# Altium PCB PCB1.PcbDoc (part 2 of 3)
Units mm, origin at the board's own origin, x right, y up, seen from the top; angles counter-clockwise.
Board outline 200 x 55 mm, 4 copper layers (Top Layer, Power Layer, GND Layer, Bottom Layer), stack 1.714 mm thick; 398 components, 267 nets, 1326 pads, 588 vias.
Unrouted connection lines stored in the file: 81.
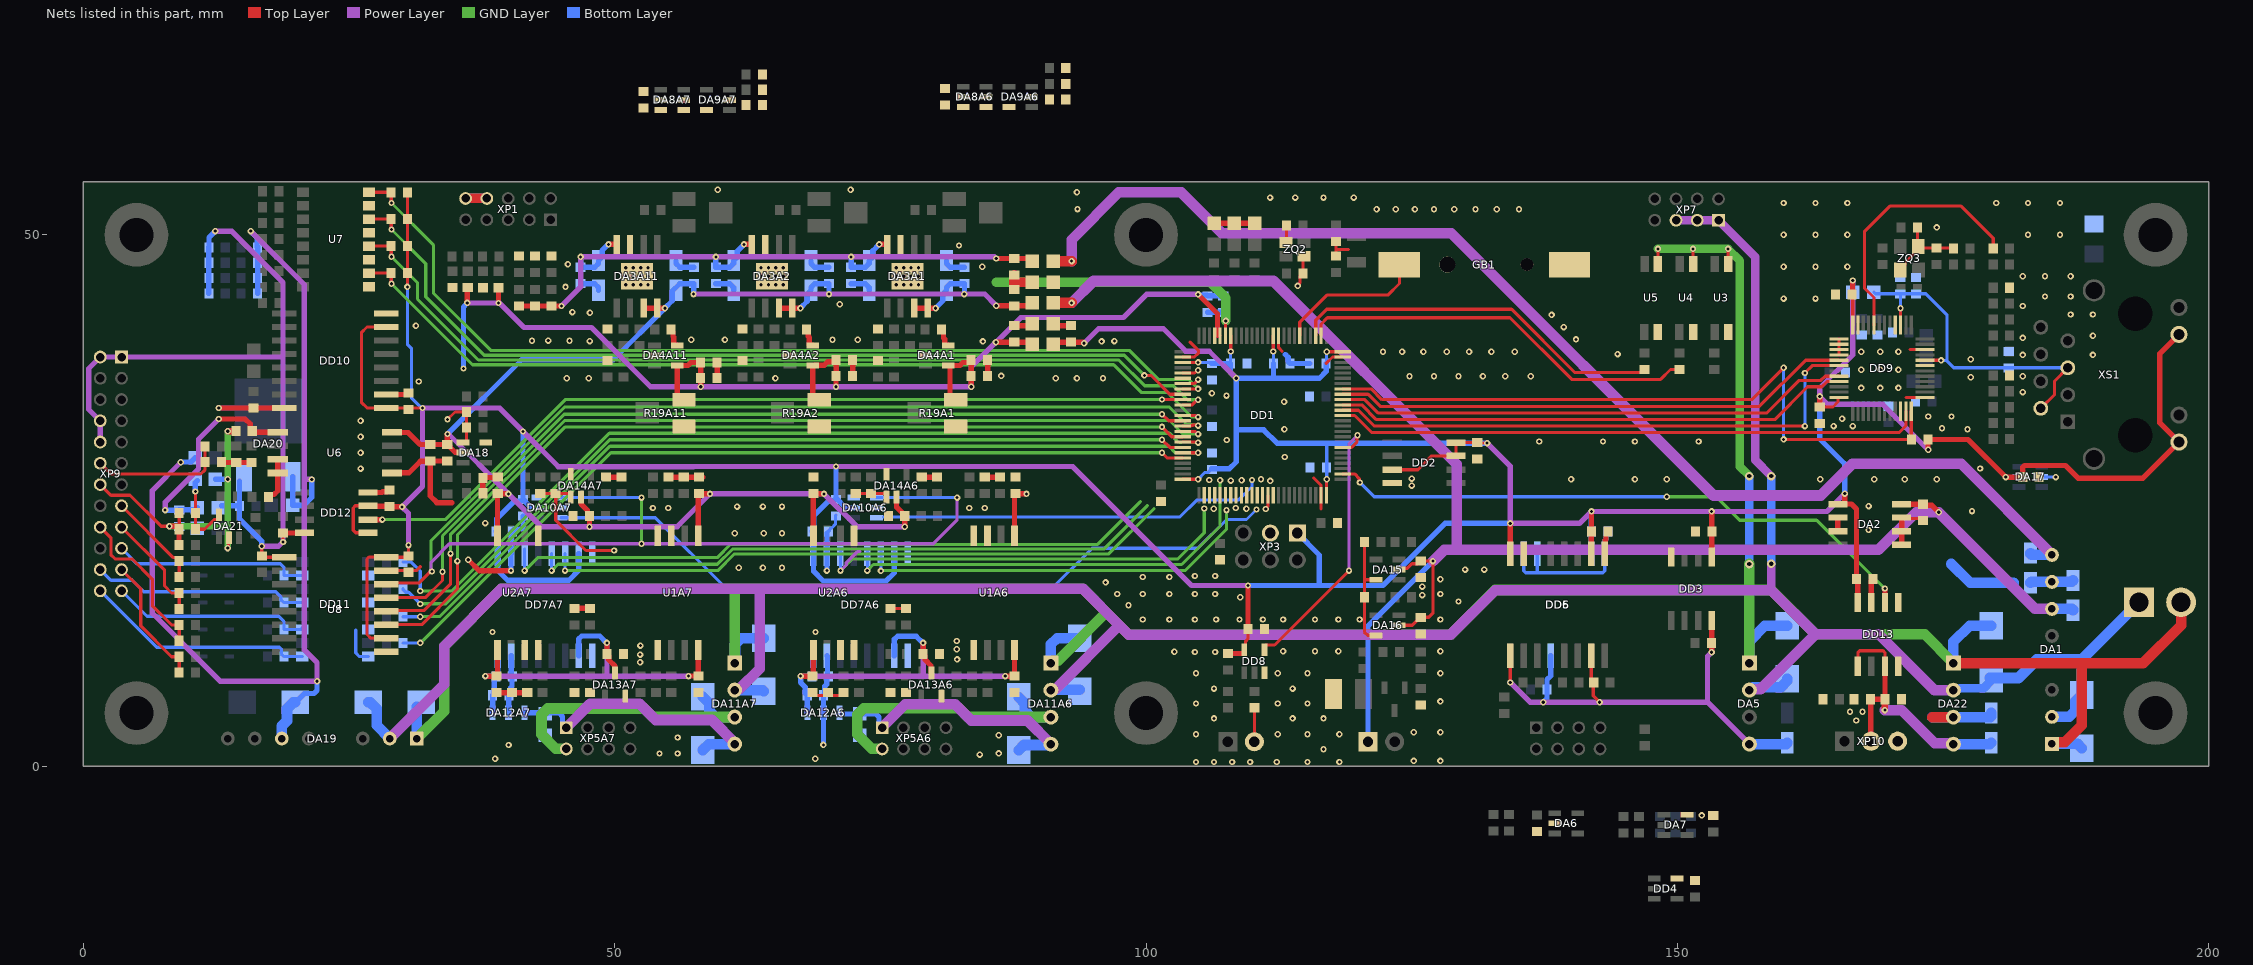
[diagram p4: the nets of this part, all layers, seen from the top]

## Via types
v1: diameter 0.6, hole 0.3, Top Layer to Bottom Layer, tented both sides, 547 vias
v2: diameter 0.6, hole 0.3, Top Layer to Bottom Layer, 36 vias
v3: diameter 0.8, hole 0.4, Top Layer to Bottom Layer, tented both sides, 4 vias
v4: diameter 0.5, hole 0.2, Top Layer to Bottom Layer, tented both sides, 1 vias

## Nets (pads, with @x,y where several pads share a name; then routed paths per layer and width w, separated by ;. In a path a pad name is that pad's centre, name@x,y a point inside that pad or via, vN(x,y) a via of type N, cw(c..) or ccw(c..) an arc to the next point about the centre after c; other vN are vias at no path point) (continued)
+3.3V: C7.1 C8.1 C11.2 C12.2 C13.2 C17.1 C18.1 C24.1 C35.1 C38.1 C39.1 C49A6.1 C49A7.1 C52A6.1 C52A7.1 C58A6.1 C58A7.1 C75.1 C78.1 C83.1 C88.1 C98.1 C101.1 C103.1 C117.1 DA2.1 DA9A6.2 DA9A7.2 DA10A6.5 DA10A7.5 DA17.5 DD1.11 DD1.19 DD1.28 DD1.50 DD1.75 DD1.100 DD2.3 DD2.7 DD2.8 DD3.1 DD5.10 DD5.16 DD6.7 DD7A6.1 DD7A6.7 DD7A7.1 DD7A7.7 DD8.5 DD9.24 DD9.36 DD10.1 DD10.7 DD11.10 DD11.16 DD12.1 DD12.3 DD13.8 L3.1 L6.1 R57.2 R72.2 R93.1 R94.1 R96.1 R97.1 XP3.1 XS1.9 XS1.11 | length 498.7
  Top Layer w0.3: DD12.1@26.8,21.95 26.776,21.974 25.626,21.974 25.4,22.2 25.4,24.3 25.6,24.5 DD12.3@26.8,24.5 DD12.3@26.825,24.475 ; DD11.16@28.485,19.685 26.876,19.685 26.7,19.509 26.7,12.39 27.04,12.05 DD11.10@28.5,12.05 ; DD11.16@28.5,19.67 30.47,19.67 C101.1@30.6,19.8 v1(30.6,20.8) ; DD10.7@28.5,41.325 26.7,41.325 26.175,40.8 26.175,34.241 26.711,33.705 DD10.1@28.5,33.705 28.502,33.703 30.598,33.703 C98.1@30.613,33.687 ; v1(30.5,45.1) R97.1@30.5,46.4 R94.1@30.5,51.5 R93.1@30.5,54 ; C98.1@30.613,33.713 31.913,33.713 v1(31.925,33.7) ; DD1.50@103.45,27 v1(104.9,27) ; DD1.28@103.45,38 v1(104.9,38) ; v1(107.975,39.025) DD1.19@107.975,40.525 ; DD8.5@109.125,10.6 109.25,10.725 DD8.5@109.25,10.95 109.375,11.075 109.375,11.75 109.6,11.975 C75.1@109.6,12.9 ; v1(111.975,39.025) DD1.11@111.975,40.525 ; DD1.75@116.975,25.475 116.975,26.975 v1(117,27) ; v1(117,39) DD1.100@118.5,39 ; DD2.3@123.171,27.896 125.596,27.896 126.896,29.196 DD2.7@129.171,29.196 DD2.8@129.171,30.446 C24.1@131.171,30.446 131.193,30.423 132.077,30.423 v1(132.1,30.4) ; C88.1@163.4,33.8 164.644,33.8 165.12,34.276 165.12,34.7 DD9.36@165.2,34.7 ; C83.1@166.475,44.425 C83.1@166.45,44.4 166.5,44.35 DD9.24@166.5,41.5 ; v1@166.475,45.675 v1(166.5,45.7)
  Top Layer w0.5: DD12.3@26.825,24.475 C103.1@28.775,24.475 ; C103.1@28.825,24.425 28.831,24.419 29.981,24.419 v1(30,24.4) ; L3.1@91.275,39.7 91.475,39.9 C7.1@92.95,39.9 94.048,39.9 94.147,39.801 v1(94.174,39.801) ; R57.2@107.7,10.6 DD8.5@109.125,10.6 ; C75.1@109.6,12.9 v1(109.6,17) ; DD5.16@134.281,20.01 v1(134.281,22.85) ; C39.1@141.9,21.85 141.916,21.866 141.916,23.966 v1(141.925,23.975) ; DD5.10@141.901,20.01 C39.1@141.901,21.838 ; C35.1@153.225,22.1 v1(153.225,23.975) ; DD3.1@153.231,19.7 C35.1@153.231,22.056 ; C88.1@163.4,33.8 v1(163.4,34.8) ; DA2.1@165.1,24.65 165.7,24.65 165.749,24.7 DA2.1@165.749,24.67 ; DA2.1@165.75,24.67 166.38,24.67 166.85,24.2 C117.1@166.85,17.625 166.989,17.486 DD13.8@166.989,15.4 ; DA2.1@165.75,24.7 v1(165.75,25.654) ; C83.1@166.475,44.425 v1@166.475,45.675 ; v1(173.6,29.775) 173.587,29.788 173.587,30.738 R72.2@173.575,30.75 177.35,30.75 v1(180.9,27.2) 182.475,27.2 C78.1@182.5,27.225 182.5,28.124 182.676,28.3 186.512,28.3 187.712,27.1 193.8,27.1 XS1.9@197.2,30.5 195.4,32.3 195.4,38.83 XS1.11@197.2,40.63
  Power Layer w0.5: v1(30.6,20.8) 30.6,23.8 v1(30,24.4) 31.925,26.325 v1@31.925,33.675 ; v1(31.925,33.7) 39.175,33.7 v1(41.375,31.5) 44.7,28.175 57.386,28.175 57.411,28.2 93.1,28.2 104.3,17 v1(109.6,17) ; v1(94.174,39.801) 95.55,41.176 101.624,41.176 103.75,39.05 105.95,39.05 v1(108.5,36.5) ; v1(132.1,30.4) 134.281,28.219 v1(134.281,22.85) 140.8,22.85 v1(141.925,23.975) v1(153.225,23.975) 164.071,23.975 v1(165.75,25.654) ; v1(166.5,45.7) 166.5,38.711 163.4,35.611 v1(163.4,34.8) 164.145,34.055 169.32,34.055 v1(173.6,29.775)
  Bottom Layer w0.3: v1(30.5,45.1) 30.5,39.703 30.875,39.328 30.875,34.674 31.849,33.7 v1(31.925,33.7) ; v1(104.9,27) 105.55,27.65 105.875,27.65 106.2,27.975 106.224,27.999 C13.2@106.224,28.024 ; v1(104.9,38) 106.1,38 C12.2@106.2,37.9 ; C8.1@107.95,37.9 107.962,37.912 107.962,39.013 v1(107.975,39.025) ; v1(111.975,39.025) 111.987,39.013 C11.2@111.987,37.9 ; C17.1@116.95,37.9 116.975,37.925 116.975,38.975 v1(117,39) ; v1(117,27) C18.1@117,28.1 117,30.4 ; L6.1@166.5,44.6 v1(166.5,45.7) ; v1(180.9,27.2) 180.912,27.212 182.137,27.212 DA17.5@182.15,27.225
  Bottom Layer w0.5: C52A7.1@41.375,25.1 41.221,24.946 40.569,24.946 38.92,23.297 38.92,22.163 C58A7.1@38.857,22.1 38.99,21.967 DD7A7.1@38.99,20 38.99,18.435 39.94,17.485 45.681,17.485 46.61,18.414 DD7A7.7@46.61,20 ; C52A7.1@41.375,25.125 v1(41.375,31.5) ; C52A7.1@41.425,25.1 41.6,24.925 41.6,24.875 42.125,24.35 42.775,24.35 DA10A7.5@42.8,24.325 ; C58A6.1@68.575,22.1 68.75,22.275 68.75,23.575 70.175,25 70.65,25 C52A6.1@70.825,25.175 ; C58A6.1@68.622,22.183 68.705,22.1 DD7A6.1@68.705,20 68.705,18.351 69.631,17.425 75.55,17.425 76.325,18.2 DD7A6.7@76.325,20 ; C52A6.1@70.825,25.1 v1(70.825,28.2) ; C52A6.1@70.875,25.175 71.7,24.35 72.475,24.35 DA10A6.5@72.5,24.325 ; C13.2@106.2,27.975 107.826,27.975 108.5,28.649 108.5,31.654 ; C12.2@106.2,37.9 C8.1@107.95,37.9 107.95,37.05 v1(108.5,36.5) ; v1(109.6,17) 116.307,17 ; C11.2@112,37.9 112,36.5 ; XP3.1@114.24,21.94 116.307,19.873 116.307,17 ; C17.1@116.95,37.9 116.95,37.15 116.3,36.5 112,36.5 ; v1(132.1,30.4) 117,30.4 112.325,30.4 111.071,31.654 108.5,31.654 ; v1(134.281,22.85) 128.15,22.85 122.3,17 116.307,17 ; DD6.7@141.883,20.01 C38.1@141.883,22.052 ; C38.1@141.901,22.019 C38.1@141.916,22.033 ; C38.1@141.906,22.075 v1@141.906,23.956 ; v1(163.4,34.8) 163.4,30.804 165.75,28.454 v1(165.75,25.654) ; 108.5,31.654 v1(108.5,36.5) ; v1(108.5,36.5) 112,36.5
+3.3VA: C9.2 C10.1 C15.2 C32A1.1 C32A2.1 C32A11.1 C33A1.1 C33A2.1 C33A11.1 C51A6.1 C51A7.1 DA4A1.4 DA4A2.4 DA4A11.4 DA8A6.5 DA8A7.5 DD1.21 DD1.22 L3.2 R19A1.3 R19A2.3 R19A11.3 R20A3.1 R20A4.1 | length 121
  Top Layer w0.3: DD1.22@106.475,40.525 106.725,40.525 DD1.21@106.975,40.525
  Top Layer w0.5: v1(36.125,43.593) 36.144,43.612 36.144,44.994 R20A4.1@36.175,45.025 ; v1(39.073,43.59) R20A3.1@39.073,45.018 ; R19A11.3@56.525,34.475 56.3,34.475 55.9,34.875 DA4A11.4@55.9,37.7 56.892,37.7 57.172,37.98 C32A11.1@58.1,37.98 ; v1@58.1,35.895 C33A11.1@58.1,36.525 ; C33A11.1@58.1,36.33 C32A11.1@58.1,37.7 ; DA4A2.4@68.65,37.7 68.65,34.775 R19A2.3@68.95,34.475 ; DA4A2.4@68.8,37.7 68.825,37.725 69.717,37.725 70.043,38.051 70.696,38.051 C32A2.1@70.85,38.205 C33A2.1@70.85,36.705 70.838,36.692 70.838,35.713 v1(70.825,35.7) ; R19A1.3@82.1,34.475 81.95,34.475 81.55,34.875 81.55,37.7 81.554,37.704 82.482,37.704 82.757,37.98 83.375,37.98 83.55,38.155 C32A1.1@83.55,38.205 ; v1(83.55,35.7) C33A1.1@83.55,36.705 C32A1.1@83.55,37.98 ; v1(85.875,39.9) C10.1@87.6,39.9 ; C10.1@87.625,39.9 89.075,39.9 L3.2@89.275,39.7 ; v1@104.919,44.381 106.725,42.575 106.725,40.525
  Power Layer w0.5: v1(36.125,43.593) v1@39.146,43.593 ; v1@39.119,43.593 39.119,43.571 39.167,43.571 41.463,41.275 47.824,41.275 53.399,35.7 v1(58.1,35.7) v1(70.825,35.7) v1(83.55,35.7) 83.55,37.55 88.225,42.225 97.875,42.225 100.05,44.4 v1(104.9,44.4)
  Bottom Layer w0.5: v1(35.775,37.425) 35.775,43.216 36.125,43.566 v1(36.125,43.593) ; v1(104.9,44.4) 104.957,44.343 105.707,44.343 C15.2@105.8,44.25 ; C15.2@105.808,44.258 C9.2@107.216,44.258
+3.3VA_ETH: C76.1 C87.1 C90.1 DD9.8 DD9.15 L6.2 XS1.2 XS1.5 | length 33.6
  Top Layer w0.3: DD9.15@171,41.5 v1(171,43.1) ; DD9.8@173.3,38.2 174.797,38.2 v1(174.816,38.182) ; XS1.2@184.2,33.677 185.5,34.977 185.5,36.247 XS1.5@186.74,37.487
  Bottom Layer w0.3: L6.2@168.5,44.6 168.65,44.45 C87.1@170.975,44.45 ; v1(171,43.1) 171,44.425 C87.1@170.975,44.45 ; v1(174.816,38.182) 175.382,38.182 ; XS1.5@186.74,37.487 C76.1@181.179,37.487 176.013,37.487 175.382,38.118 175.382,42.433 173.365,44.45 C90.1@172.442,44.45 C87.1@170.975,44.45
+5V: C2.1 C6.1 C71.1 C72.1 DA1.6 DA2.8 DA15.2 DA16.2 L1.1 XP6.1 | length 155.8
  Top Layer w0.3: DA15.2@123.8,18.5 123.921,18.621 124.59,18.621 125.019,19.05 125.575,19.05 C71.1@125.85,19.325 125.863,19.312 126.988,19.312 v1(127,19.3) 127,14.4 126.607,14.007 C72.1@125.85,14.007 125.8,14.007 125.05,13.257 124.121,13.257 123.996,13.382 DA16.2@123.871,13.257
  Top Layer w0.5: DA2.8@170.735,24.65 DA2.8@171.1,24.65 C6.1@173.1,24.65 173.209,24.541 173.952,24.541 v1@174.574,23.919
  Top Layer w1: L1.1@91.275,43.6 v1(93,43.6)
  Power Layer w1: v1(93,43.6) 95.058,45.658 111.992,45.658 129.225,28.424 129.225,20.35 ; v1(127,19.3) 128.05,20.35 129.225,20.35 ; v1@174.593,23.877 183.65,14.82 DA1.6@185.25,14.82 ; v1(174.593,23.9) 172.465,23.9 168.915,20.35 129.225,20.35
  Bottom Layer w0.5: XP6.1@120.896,2.3 120.896,13.196 v1(127,19.3)
  Bottom Layer w1: DA1.6@185.25,14.82 187.125,14.82 187.225,14.72 C2.1@187.225,14.675
+5V_DRVA6: C55A6.1 C60A6.1 C62A6.1 C65A6.1 C66A6.1 DA12A6.1 DA13A6.2 DD7A6.10 DD7A6.16 U1A6.8 U2A6.1 | length 44.2
  Top Layer w0.5: v1(67.5,8.475) C55A6.1@68.6,8.475 ; C55A6.1@68.625,8.475 68.7,8.55 U2A6.1@68.7,10.925 ; v1(79.025,11.6) C66A6.1@79.025,10.575 79.2,10.4 79.2,10.025 79.775,9.45 79.775,8.785 DA13A6.2@79.8,8.76 ; v1(86.75,8.475) C60A6.1@87.625,8.475 U1A6.8@87.625,11.1
  Power Layer w0.5: v1(67.5,8.475) 79.025,8.475 ; v1(79.025,11.6) 79.025,8.475 ; v1(86.75,8.475) 79.025,8.475
  Bottom Layer w0.5: C65A6.1@68.12,6.62 68.12,5.028 DA12A6.1@68.145,5.003 ; C65A6.1@68.125,6.675 67.95,6.85 67.95,7.421 67.5,7.871 v1(67.5,8.475) 67.519,8.456 68.544,8.456 C62A6.1@68.575,8.425 68.705,8.555 DD7A6.16@68.705,10.6 ; DD7A6.10@76.325,10.4 76.325,11.932 76.618,12.225 78.373,12.225 78.998,11.6 v1(79.025,11.6)
+5V_DRVA7: C55A7.1 C60A7.1 C62A7.1 C65A7.1 C66A7.1 DA12A7.1 DA13A7.2 DD7A7.10 DD7A7.16 U1A7.8 U2A7.1 | length 42.5
  Top Layer w0.5: v1(37.835,8.475) C55A7.1@38.875,8.475 38.985,8.585 U2A7.1@38.985,10.925 ; v1(49.275,11.6) 49.275,10.525 49.45,10.35 49.45,10.008 50.025,9.433 50.025,8.785 DA13A7.2@50.05,8.76 ; v1(56.95,8.475) 56.963,8.488 57.863,8.488 C60A7.1@57.875,8.5 U1A7.8@57.875,10.925
  Power Layer w0.5: 38.825,8.475 49.275,8.475 ; v1(49.275,11.6) 49.275,8.475 ; v1(56.95,8.475) 49.275,8.475
  Bottom Layer w0.5: v1(37.835,8.475) 38.915,8.475 38.99,8.55 DD7A7.16@38.99,10.4 ; C65A7.1@38.5,6.675 38.675,6.85 38.675,7.193 C62A7.1@38.675,8.475 ; DA12A7.1@38.525,5.025 C65A7.1@38.525,6.65 ; DD7A7.10@46.61,10.4 46.61,11.957 46.903,12.25 48.598,12.25 49.248,11.6 v1(49.275,11.6)
+5V_FS: C114.1 C115.1 C116.1 DA22.4 DD13.1 DD13.3 XP10.2 | length 26.2
  Top Layer w0.3: DD13.1@166.989,9.4 166.99,10.685 167.166,10.861 169.363,10.861 169.539,10.685 DD13.3@169.539,9.4
  Top Layer w0.5: XP10.2@168.225,2.35 168.2,2.375 168.2,6.275 C114.1@168.175,6.3 C115.1@169.525,6.3 ; C115.1@169.539,6.311 DD13.3@169.539,9.4
  Top Layer w0.6: v1(169.525,5.275) 169.525,6.297 C115.1@169.539,6.311
  Power Layer w1: v1(169.525,5.275) 171.1,5.275 174.223,2.152 175.898,2.152 DA22.4@175.975,2.075
  Bottom Layer w0.6: DA22.4@175.899,2.151 DA22.4@175.975,2.075
  Bottom Layer w1: DA22.4@175.975,2.075 179.4,2.075 C116.1@179.525,2.2
+5V_HW: C95.1 C96.1 C106.1 C107.1 DA20.3 DD10.16 DD11.1 DD12.8 L7.1 R110.2 R111.2 R112.2 R113.2 XP9.1 XP9.2 XP9.8 XP9.10 | length 93.6
  Top Layer w0.3: C96.1@16.8,19.8 v1(16.8,20.7) ; C96.1@17.1,19.695 17.125,19.67 DD11.1@18.8,19.67 ; v1(18.8,21.1) C106.1@18.8,21.95
  Top Layer w0.5: v1(12.75,33.7) C95.1@16,33.7 16.005,33.705 18.995,33.705 DD10.16@19,33.71 ; C106.1@18.8,21.95 DD12.8@20.8,21.95
  Power Layer w0.5: XP9.10@1.6,30.5 XP9.8@1.6,32.5 0.518,33.582 0.518,37.418 XP9.2@1.6,38.5 18.8,38.5 ; v1(12.425,50.35) 13.956,50.35 18.8,45.506 18.8,38.5 ; v1(12.75,33.7) 12.755,33.705 18.8,33.705 ; v1(16.8,20.7) 18.373,20.7 18.773,21.1 v1(18.8,21.1) 18.8,33.705 ; 18.8,33.705 18.8,38.5
  Bottom Layer w0.5: R110.2@11.809,44.475 R111.2@11.809,45.925 R113.2@11.809,48.825 ; R113.2@11.825,48.8 11.825,49.75 v1(12.425,50.35) ; L7.1@13,24.5 C107.1@14.7,24.5 ; DA20.3@14.7,26.804 C107.1@14.7,24.5 ; v1@16.767,20.733 16.781,20.746 16.781,21.194 14.7,23.275 C107.1@14.7,24.5
+5V_PS: C37.1 C41.1 C42.1 C43.1 C44.1 C45.1 C46.1 DA5.4 DA6.2 DA7.5 DD3.8 DD4.5 DD5.1 DD5.7 DD6.13 | length 48.4
  Top Layer w0.3: v1@134.231,7.875 v1(134.281,7.875) ; v1(134.281,7.875) DD5.1@134.281,10.41 ; DD5.7@141.901,10.41 141.901,8.13 C44.1@142.131,7.9 ; C44.1@142.131,7.875 142.088,7.875 142.088,6.619 v1(142.681,6.025)
  Top Layer w0.5: v1(153.225,10.725) DD3.8@153.225,13.7
  Power Layer w0.5: v1(134.281,7.875) 136.131,6.025 v1(137.381,6.025) v1(142.681,6.025) 152.836,6.025 ; v1(153.225,10.725) 152.836,10.336 152.836,6.025 ; DA5.4@156.781,2.08 152.836,6.025
  Bottom Layer w0.5: v1(137.381,6.025) 137.731,6.375 C45.1@137.731,7.2 137.731,8.15 138.091,8.51 DD6.13@138.091,10.41
  Bottom Layer w1: DA5.4@156.781,2.08 160.25,2.08 160.35,2.18 C43.1@160.35,2.2
  other v1: 152.3,-4.629
+5VA: C4.1 C28A1.1 C28A2.1 C28A11.1 C29A1.1 C29A2.1 C29A11.1 C54A6.1 C54A7.1 C61A6.1 C61A7.1 C67A6.1 C67A7.1 C97.1 C100.1 DA3A1.7 DA3A1.8 DA3A2.7 DA3A2.8 DA3A11.7 DA3A11.8 DA14A6.2 DA14A7.2 DA18.2 L1.2 U1A6.1 U1A7.1 U2A6.8 U2A7.8 U6.8 | length 162.8
  Top Layer w0.5: U6.8@29.05,31.425 29.067,31.408 30.567,31.408 31.7,30.275 C97.1@32.65,30.275 32.654,30.279 34.246,30.279 C100.1@34.25,30.282 ; C100.1@34.263,30.295 34.263,31.245 v1(34.275,31.257) ; C100.1@34.3,30.282 34.475,30.107 34.475,30.057 35,29.532 35.7,29.532 DA18.2@35.725,29.507 ; U2A7.8@38.985,21.675 C61A7.1@38.985,25.625 ; C61A7.1@38.998,25.638 39.004,25.631 39.994,25.631 v1(40,25.625) ; DA14A7.2@46.825,25.325 46.85,25.3 46.85,24.675 47.45,24.075 47.45,23.725 C67A7.1@47.625,23.55 47.631,23.544 47.631,22.544 v1(47.638,22.538) ; DA3A11.7@52.75,43.105 DA3A11.8@54,43.105 54.005,43.1 v1(54.725,43.1) ; U1A7.1@57.875,21.675 57.875,25.552 C54A7.1@57.96,25.638 ; C54A7.1@57.95,25.65 57.963,25.638 58.963,25.638 v1(58.975,25.625) ; DA3A2.7@65.466,43.105 65.471,43.1 v1(67.475,43.1) ; U2A6.8@68.7,21.675 68.7,25.6 68.75,25.65 68.762,25.638 69.688,25.638 v1(69.7,25.625) ; DA14A6.2@76.525,25.325 76.525,24.375 C67A6.1@77.262,23.638 ; v1(77.3,22.538) C67A6.1@77.3,23.55 ; DA3A1.7@78.2,43.105 78.205,43.1 v1(80.2,43.1) ; v1(85.9,43.325) C4.1@87.6,43.325 ; U1A6.1@87.619,21.681 87.619,25.606 87.663,25.65 C54A6.1@87.725,25.65 87.738,25.638 88.738,25.638 v1(88.75,25.625) ; C4.1@87.65,43.325 89,43.325 L1.2@89.275,43.6
  Power Layer w0.5: v1(34.275,31.257) 34.294,31.238 34.387,31.238 v1@39.981,25.644 ; v1(40,25.625) 43.1,22.525 v1@47.631,22.525 ; v1(47.638,22.538) 55.888,22.538 58.987,25.638 59,25.625 v1(69.7,25.625) 72.787,22.538 v1(77.3,22.538) ; v1@57.675,44.425 v1(70.175,44.425) v1(82.9,44.425) 84.825,44.425 85.9,43.35 v1(85.9,43.325)
  Bottom Layer w0.5: v1(34.275,31.257) 41.262,38.244 49.869,38.244 v1(54.725,43.1) 55.425,43.8 55.425,44.7 56.125,45.4 C28A11.1@57.45,45.4 57.437,45.387 57.437,44.438 v1(57.425,44.425) ; v1@67.494,43.119 68.125,43.75 68.125,44.425 C29A2.1@68.475,44.775 68.475,45.05 68.825,45.4 C28A2.1@70.175,45.4 v1(70.175,44.425) ; v1@80.219,43.119 80.875,43.775 80.875,44.425 C29A1.1@81.225,44.775 81.225,45.05 81.575,45.4 C28A1.1@82.925,45.4 82.912,45.387 82.912,44.438 v1(82.9,44.425)
+5VA_HW: C93.1 C111.1 L7.2 U6.1 | length 20.1
  Top Layer w0.5: v1(12.75,32.675) 15.233,32.675 15.725,32.183 15.725,31.7 16,31.425 U6.1@18.3,31.425
  Power Layer w0.5: v1(7.7,24.1) 7.7,24.832 10.841,27.973 10.841,30.766 v1(12.75,32.675)
  Bottom Layer w0.5: v1(7.7,24.1) 7.703,24.097 C111.1@9.032,24.097 ; C111.1@9.032,24.12 10.512,24.12 L7.2@10.717,24.325
+12V_DRVA6: C53A6.1 C59A6.2 DA11A6.4 DA12A6.3 XP5A6.1 | length 26.7
  Power Layer w1: XP5A6.1@75.185,3.653 77.357,5.825 82.023,5.825 83.545,4.303 88.847,4.303 DA11A6.4@91.05,2.1
  Bottom Layer w0.5: DA12A6.3@71.145,5.003 71.145,4.947 71.18,4.912 C59A6.2@73.045,4.912 ; C59A6.2@73.053,4.903 74.589,4.903 74.882,4.611 74.882,3.956 XP5A6.1@75.185,3.653
  Bottom Layer w1: C53A6.1@88.015,1.488 88.525,1.998 90.973,1.998 DA11A6.4@91.05,2.075 ; DA11A6.4@90.984,2.144 DA11A6.4@91.045,2.083
+12V_DRVA7: C53A7.1 C59A7.2 DA11A7.4 DA12A7.3 XP5A7.1 | length 26.6
  Power Layer w1: XP5A7.1@45.45,3.625 47.688,5.863 52.336,5.863 53.858,4.342 59.16,4.342 DA11A7.4@61.363,2.138
  Bottom Layer w0.5: DA12A7.3@41.525,5.025 43.475,5.025 44.758,5.025 45.1,4.683 45.1,3.975 XP5A7.1@45.45,3.625
  Bottom Layer w1: C53A7.1@58.3,1.525 58.85,2.075 DA11A7.4@61.325,2.075
+24V: C1.1 C36.1 C50A6.1 C50A7.1 C104.1 C113.1 DA1.2 DA5.2 DA11A6.2 DA11A7.2 DA19.2 DA22.2 XP2.1 XP7.1 XP7.3 XP7.5 | length 273.8
  Power Layer w0.8: XP7.5@149.875,51.375 XP7.3@151.875,51.375 XP7.1@153.875,51.375 157.324,47.926 157.324,28.801 v3(158.825,27.3) ; 158.831,16.569 v3(158.831,19.05)
  Power Layer w1: DA19.2@28.84,2.6 33.952,7.712 33.952,11.302 39.333,16.683 63.65,16.683 ; DA11A7.2@61.325,7.18 61.402,7.257 61.732,7.257 63.65,9.175 63.65,16.683 ; DA11A6.2@91.045,7.163 91.121,7.24 91.481,7.24 97.495,13.255 ; DA5.2@156.781,7.16 156.848,7.226 157.826,7.226 163,12.4 ; DA22.2@175.975,7.155 174.195,7.155 168.95,12.4 163,12.4 ; 63.65,16.683 94.067,16.683 97.495,13.255 ; 97.495,13.255 98.376,12.374 128.657,12.374 132.852,16.569 158.831,16.569 163,12.4
  Bottom Layer w0.8: v3(158.831,19.05) v3@158.831,27.3 ; DA22.2@175.975,7.155 176.09,7.27 176.514,7.27 176.582,7.337 178.825,7.337 179.525,8.037 C113.1@179.525,8.225
  Bottom Layer w1: C104.1@26.8,6 27,6 27.6,5.4 27.6,3.84 DA19.2@28.783,2.657 ; DA11A7.2@61.325,7.155 63.92,7.155 C50A7.1@64.025,7.05 ; DA11A6.2@91.045,7.163 91.065,7.183 93.725,7.183 C50A6.1@93.745,7.203 ; DA5.2@156.781,7.16 156.89,7.16 157.15,7.42 159.164,7.42 159.169,7.425 159.75,7.425 160.35,8.025 C36.1@160.35,8.225 ; C113.1@179.395,8.295 182.095,8.295 183.835,10.035 188.05,10.035 ; DA1.2@185.25,4.64 186.864,4.64 187.45,5.226 187.45,6.1 C1.1@188.05,6.7 188.05,10.035 ; XP2.1@193.44,15.425 188.05,10.035
+24V_HW: C105.2 C108.1 DA19.6 DA20.1 L8.1 R106.2 R107.2 R108.2 R109.2 | length 100.7
  Power Layer w0.5: v1(9.175,28.6) 6.5,25.925 6.5,14.391 12.903,7.988 v1(22,7.988) 22,9.741 20.8,10.941 20.8,26.996 ; v1(15.75,50.35) 20.8,45.3 20.8,26.996 ; v1(21.5,26.975) 21.481,26.994 20.802,26.994 20.8,26.996
  Bottom Layer w0.5: v1(9.175,28.6) 9.202,28.6 9.232,28.63 10.133,28.63 L8.1@10.518,29.015 ; v1(15.75,50.35) 15.75,50.323 16.348,49.725 16.348,48.886 R109.2@16.409,48.825 ; R106.2@16.409,44.475 R107.2@16.409,45.925 R108.2@16.409,47.375 R109.2@16.409,48.875 ; DA20.1@19.7,27.229 C105.2@19.7,24.535 19.732,24.567 20.792,24.567 21.5,25.275 v1(21.5,26.975) ; C108.1@19.959,6 20.804,6.845 21.707,6.845 22,7.138 v1(22,7.988)
  Bottom Layer w1: DA19.6@18.68,2.6 18.68,3.78 19.169,4.269 19.169,5.4 19.769,6 C108.1@19.959,6
+24VA_HW: C110.1 C112.1 DA21.5 L8.2 | length 7.7
  Top Layer w0.3: v1(10.55,25.85) 10.558,25.842 C112.1@10.558,23.823 ; C112.1@10.574,23.864 C110.1@10.575,22.3 C110.1@10.575,22.3 11.408,22.3 12.308,23.2 12.633,23.2 12.758,23.325 DA21.5@12.758,23.65
  Bottom Layer w0.5: v1(10.55,25.85) 10.534,25.866 10.534,26.67 L8.2@10.753,26.888
+VBAT: DD1.6 GB1.2 | length 13.9
  Top Layer w0.3: DD1.6@114.475,40.525 114.475,41.777 117.023,44.325 122.75,44.325 123.85,45.425 GB1.2@123.85,47.2
-5V: C3.2 DA1.8 L2.1 | length 116.6
  Top Layer w1: L2.1@91.275,47.5 91.3,47.525 v1(93,47.525)
  Power Layer w1: v1(93,47.525) 93,49.55 97.45,54 103.3,54 107.15,50.15 128.725,50.15 153.4,25.475 163.5,25.475 166.475,28.45 176.7,28.45 DA1.8@185.25,19.9
  Bottom Layer w1: C3.2@183.225,20.05 183.225,20 183.325,19.9 DA1.8@185.25,19.9
-5VA: C5.2 C26A1.2 C26A2.2 C26A11.2 C27A1.1 C27A2.1 C27A11.1 DA3A1.4 DA3A2.4 DA3A11.4 L2.2 R2.1 R4.1 R6.1 | length 69.2
  Top Layer w0.5: R2.1@41,43.3 R4.1@42.525,43.3 R6.1@44.05,43.3 v1(45,43.3) ; v1(49.425,49.1) 50.195,49.1 DA3A11.4@50.2,49.105 ; v1(62.175,49.1) 62.911,49.1 DA3A2.4@62.916,49.105 ; v1(74.9,49.1) 75.645,49.1 DA3A1.4@75.65,49.105 ; v1(85.9,47.775) C5.2@87.6,47.775 89,47.775 L2.2@89.275,47.5
  Power Layer w0.5: v1(45,43.3) 46.8,45.1 v1(46.8,47.925) v1(59.525,47.925) v1(72.25,47.925) ; v1@72.277,47.925 85.723,47.925 85.854,47.794 v1@85.881,47.794
  Bottom Layer w0.5: v1(46.8,47.925) C27A11.1@46.8,46.95 48.125,46.95 48.475,47.3 C26A11.2@48.475,47.575 48.825,47.925 48.825,48.531 49.375,49.081 49.406,49.081 v1(49.425,49.1) ; v1(59.525,47.925) C27A2.1@59.525,46.95 60.85,46.95 61.2,47.3 C26A2.2@61.2,47.575 61.55,47.925 61.55,48.475 v1@62.156,49.081 ; v1(72.25,47.925) C27A1.1@72.25,46.95 73.6,46.95 73.95,47.3 C26A1.2@73.95,47.575 74.3,47.925 74.3,48.5 v1@74.881,49.081
ACTn: DD9.20 R64.2 | length 24.5
  Top Layer w0.3: DD9.20@168.5,41.5 168.5,44.1 167.6,45 167.6,50.3 170,52.7 176.7,52.7 179.725,49.675 R64.2@179.725,48.712
AGND: C4.2 C5.1 C9.1 C10.2 C15.1 C26A1.1 C26A2.1 C26A11.1 C27A1.2 C27A2.2 C27A11.2 C28A1.2 C28A2.2 C28A11.2 C29A1.2 C29A2.2 C29A11.2 C30A1.2 C30A2.2 C30A11.2 C31A1.2 C31A2.2 C31A11.2 C32A1.2 C32A2.2 C32A11.2 C33A1.2 C33A2.2 C33A11.2 C34A3.2 C34A4.2 C51A6.2 C51A7.2 C54A6.2 C54A7.2 C56A6.1 C56A7.1 C61A6.2 C61A7.2 C64A6.2 C64A7.2 C67A6.2 C67A7.2 C97.2 C99.2 C100.2 DA3A1.3 DA3A1.EPAD DA3A2.3 DA3A2.EPAD DA3A11.3 DA3A11.EPAD DA4A1.2 DA4A1.6 DA4A2.2 DA4A2.6 DA4A11.2 DA4A11.6 DA8A6.2 DA8A7.2 DA14A6.5 DA14A7.5 DA18.5 DD1.20 R1.2 R3.2 R5.2 R7.2 R8.2 R16A1.2 R16A2.2 R16A11.2 R19A1.1 R19A2.1 R19A11.1 R34A6.2 R34A7.2 R41A6.2 R41A7.2 R99.2 U1A6.3 U1A6.4 U1A7.3 U1A7.4 U2A6.5 U2A7.5 U6.5 XP1.8 XP1.10 | length 83.3
  Top Layer w0.3: DD1.20@107.475,40.525 107.475,41.875 v1(107.5,41.9)
  Top Layer w0.5: U6.5@29.05,27.6 30.625,27.6 31.72,28.695 32.62,28.695 C97.2@32.65,28.725 ; C100.2@34.25,28.725 C97.2@32.65,28.725 ; 34.666,24.8 33.275,24.8 32.65,25.425 C97.2@32.65,28.725 ; C99.2@37.604,25.679 C99.2@37.6,25.682 R99.2@37.6,27.132 37.628,27.16 38.963,27.16 C61A7.2@38.994,27.191 ; R41A7.2@49.2,27.2 C64A7.2@50.65,27.2 ; R34A7.2@55.05,27.187 C54A7.2@58.287,27.187 ; C31A11.2@55.325,41.025 55.5,40.85 55.5,40.425 55.55,40.375 55.55,39.625 55.575,39.6 DA4A11.6@55.9,39.6 ; C33A11.2@59.65,36.525 C32A11.2@59.65,37.98 ; C31A2.2@68.05,41.075 68.225,40.9 68.225,40.425 68.325,40.325 68.325,39.625 68.35,39.6 DA4A2.6@68.65,39.6 ; C33A2.2@72.4,36.705 C32A2.2@72.4,38.205 ; R41A6.2@78.9,27.2 C64A6.2@80.35,27.2 ; C31A1.2@80.775,41.075 80.95,40.9 80.95,40.297 81.05,40.197 81.05,39.625 81.075,39.6 DA4A1.6@81.4,39.6 ; R34A6.2@84.825,27.2 C56A6.1@86.275,27.2 ; C33A1.2@85.1,36.705 C32A1.2@85.1,38.205 ; C10.2@87.625,41.45 89.075,41.45 R8.2@89.275,41.65
  Top Layer w0.9: XP1.10@35.975,53.425 XP1.8@37.975,53.425 ; 87.575,45.349 87.575,44.9 C4.2@87.6,44.875 ; C5.1@87.6,46.225 87.575,46.2 87.575,45.55 R7.2@89.275,45.55
  GND Layer w0.9: XP1.10@35.975,53.425 XP1.8@37.975,53.425 ; 85.899,45.555 106.034,45.555 107.5,44.09 v1(107.5,41.9)
  Bottom Layer w0.5: C27A11.2@46.8,45.4 48.125,45.4 48.475,45.05 C26A11.1@48.475,44.775 ; C29A11.2@55.775,47.575 55.775,47.3 56.125,46.95 C28A11.2@57.45,46.95 ; C27A2.2@59.525,45.4 60.85,45.4 61.2,45.05 C26A2.1@61.2,44.775 ; C29A2.2@68.475,47.575 68.475,47.3 68.825,46.95 C28A2.2@70.175,46.95 ; C27A1.2@72.25,45.4 73.6,45.4 73.95,45.05 C26A1.1@73.95,44.775 ; C29A1.2@81.225,47.575 81.225,47.3 81.575,46.95 C28A1.2@82.925,46.95 ; C15.1@105.8,42.7 105.804,42.704 107.262,42.704 C9.1@107.266,42.708 107.306,42.708 107.481,42.533 107.481,41.918 v1@107.499,41.9
  Bottom Layer w0.9: XP1.10@35.975,53.425 XP1.8@37.975,53.425
  other v1: 45.5,36.5 47.559,36.5 65.125,36.5 86.375,36.725 84.65,39.975 47.65,40 42.225,40.025 45.75,40.025 43.75,40.05 57.2,40.125 60.375,40.125 70.5,40.125 72.875,40.125 47.675,42.675 46.025,42.725 71.175,43.475 45.375,45.1 84.6,47 45.6,47.225 82.4,49 59.7,54.25 72.2,54.25
  other v2: 51.05,45.305 51.75,45.305 52.45,45.305 53.15,45.305 63.766,45.305 64.466,45.305 65.166,45.305 65.866,45.305 76.5,45.305 77.2,45.305 77.9,45.305 78.6,45.305 51.05,46.105 51.75,46.105 52.45,46.105 53.15,46.105 63.766,46.105 64.466,46.105 65.166,46.105 65.866,46.105 76.5,46.105 77.2,46.105 77.9,46.105 78.6,46.105 51.05,46.905 51.75,46.905 52.45,46.905 53.15,46.905 63.766,46.905 64.466,46.905 65.166,46.905 65.866,46.905 76.5,46.905 77.2,46.905 77.9,46.905 78.6,46.905
AGND_HW: C93.2 C94.1 C109.2 C110.2 C111.2 C112.2 DA21.2 R75.2 R82.2 R114.2 R115.1 R116.2 U6.3 U6.4 XP9.14 | length 42.1
  Top Layer w0.3: XP9.14@1.6,26.5 2.6,25.5 4.4,25.5 7.325,22.575 v1(8.1,22.575) ; C112.2@9.024,23.864 9.024,22.426 C110.2@9.025,22.3 C110.2@9.025,22.3 ; v1(13.6,20.525) 13.654,20.579 13.654,21.446 DA21.2@13.708,21.5
  Top Layer w0.5: v1(8.1,22.575) 8.875,22.575 9.024,22.426 C110.2@9.152,22.298 ; C109.2@9,20.802 C110.2@9,22.275 ; R75.2@12.991,28.625 13.041,28.575 R82.2@14.391,28.575 C94.1@15.841,28.575 ; R115.1@17.408,25.345 17.408,25.395 17.583,25.57 17.948,25.57 18.3,25.921 U6.3@18.3,28.875 U6.3@17.668,28.875
  Top Layer w0.6: v1(13.6,31.525) C93.2@14.35,31.525
  GND Layer w0.6: v1(8.1,22.575) 13.6,22.575 ; v1(13.6,20.525) 13.6,22.575 ; v1(13.6,31.525) v1(13.6,27) 13.6,22.575
  Bottom Layer w0.3: R116.2@12.438,27.015 R116.2@12.453,27
  Bottom Layer w0.5: v1(8.1,22.575) 10.542,22.575 R114.2@10.717,22.4 ; R116.2@12.453,27 12.46,27.008 13.592,27.008 v1(13.6,27)
AN_MOD_HW: R75.1 R78.2 XP9.12 | length 12.6
  Top Layer w0.3: XP9.12@1.6,28.5 2.6,27.5 11.076,27.5 11.441,27.865 R75.1@11.441,28.625 ; R75.1@11.441,28.599 R78.2@11.441,30.075
COM1_HW: R77.2 R85.1 XP9.17 | length 10.4
  Top Layer w0.3: XP9.17@3.6,22.5 7.648,18.452 7.648,16.952 8.3,16.3 R77.2@9.025,16.3 R85.1@9.025,14.8
COM2_HW: R80.2 R92.1 XP9.18 | length 15.1
  Top Layer w0.3: XP9.18@1.6,22.5 2.6,21.5 2.6,19.9 3,19.5 4.6,19.5 6.5,17.6 6.5,15.1 8.3,13.3 R80.2@9.025,13.3 R92.1@9.025,11.8
COM3_HW: R83.2 R86.1 XP9.21 | length 12.4
  Top Layer w0.3: XP9.21@3.6,18.5 5.4,16.7 5.4,13.2 8.3,10.3 R83.2@9.025,10.3 9.025,10.152 R86.1@9.025,8.8
CRASH_IND: DD1.3 R55.2 | length 35.4
  Top Layer w0.3: DD1.3@115.975,40.525 115.975,41.975 117,43 134.4,43 140.35,37.05 146.625,37.05 R55.2@146.9,37.325
DIG_MOD_HW: R74.2 R91.1 XP9.15 | length 9.1
  Top Layer w0.3: XP9.15@3.6,24.5 8.475,19.625 8.75,19.625 9.025,19.35 R74.2@9.025,19.3 R91.1@9.025,17.8
DRV1_AN_MOD: DD1.63 R31A6.1
  other v1: 110.825,27
DRV1_CUR: C69A6.2 DA14A6.1 DD1.30 R45A6.1 | length 4.7
  Top Layer w0.3: C69A6.2@72.691,25.65 75.45,25.65 75.575,25.525 DA14A6.1@75.575,25.325 ; DD1.30@103.45,37 104.569,37 104.819,37.25 v1(104.9,37.25)
DRV1_DIG_MOD: DA10A6.3 DD1.61 | length 36.5
  Bottom Layer w0.3: 75.3,23.45 103.169,23.45 104.759,25.04 108.697,25.04 109.975,26.318 v1(109.975,26.925)
DRV1_ERR1: DD1.55 DD7A6.5 | length 41
  GND Layer w0.3: v1(73.775,18.4) 74.35,18.975 103.35,18.975 106.975,22.6 v1(106.975,26.9)
  Bottom Layer w0.3: v1(73.775,18.4) 73.78,18.405 73.78,20.195 DD7A6.5@73.785,20.2
DRV1_ERR2: DD1.56 DD7A6.6 | length 37.8
  GND Layer w0.3: v1(75.05,18.375) 75.075,18.4 103.674,18.4 107.575,22.301 v1(107.575,24.1)
  Bottom Layer w0.3: v1(75.05,18.375) 75.053,18.378 DD7A6.6@75.053,20.198
DRV1_ON: DD1.52 DD7A6.3 | length 42.5
  Power Layer w0.3: v1(71.25,18.4) 71.786,18.936 71.786,19.136 72.845,20.195 73.095,20.195
  GND Layer w0.3: v1@71.268,18.418 72.35,19.5 103,19.5 105.475,21.975 v1(105.475,24.25)
  Bottom Layer w0.3: DD7A6.3@71.245,20.2 71.248,20.198 71.248,18.402 v1(71.25,18.4)
DRV1_SEL_AN: DA8A6.6 DD1.54
  other v1: 106.375,24.225
DRV1_SEL_DIG: DA10A6.6 DD1.53
  other v1: 105.95,26.925
DRV2_AN_MOD: DD1.64 R31A7.1 | length 1.3
  Top Layer w0.3: v1@111.275,24.256 111.475,24.456 DD1.64@111.475,25.475
  other v1: 111.275,24.2
DRV2_CUR: C69A7.2 DA14A7.1 DD1.31 R45A7.1 | length 12.3
  Top Layer w0.3: C69A7.2@43,25.65 R45A7.1@44.45,25.65 ; DA14A7.1@45.875,25.325 45.875,25.525 45.75,25.65 R45A7.1@44.45,25.65 ; v1(49.95,20.3) 47.296,20.3 44.45,23.146 R45A7.1@44.45,25.65
  other v1: 106.2,35.1
DRV2_DIG_MOD: DA10A7.3 DD1.62 | length 71.3
  Bottom Layer w0.3: DA10A7.3@44.95,23.375 53.83,23.375 60.522,16.683 91.108,16.683 94.934,20.509 104.884,20.509 107.585,23.21 109.46,23.21 v1(110.4,24.15)
DRV2_ERR1: DD1.60 DD7A7.5 | length 60.2
  GND Layer w0.3: v1(44.073,18.4) 44.672,19 59.664,19 61.089,20.425 96.025,20.425 100.125,24.525
  Bottom Layer w0.3: DD7A7.5@44.07,20 44.071,19.999 44.071,18.401 v1(44.073,18.4)
  other v1: 109.45,24.225
DRV2_ERR2: DD1.65 DD7A7.6 | length 59.4
  GND Layer w0.3: v1(45.333,18.4) 59.7,18.4 61.275,19.975 96.5,19.975 100.75,24.225
  Bottom Layer w0.3: v1(45.333,18.4) 45.337,18.403 45.337,19.997 DD7A7.6@45.34,20
  other v1: 111.7,26.85
DRV2_ON: DD1.57 DD7A7.3 | length 62.7
  GND Layer w0.3: v1(41.525,18.4) 42.75,19.625 59.652,19.625 60.902,20.875 95.45,20.875 99.475,24.9
  Bottom Layer w0.3: v1(41.525,18.4) 41.527,18.403 41.527,20.447 DD7A7.3@41.525,20.449
  other v1: 107.975,26.875
DRV2_SEL_AN: DA8A7.6 DD1.59
  other v1: 109,26.9
DRV2_SEL_DIG: DA10A7.6 DD1.58
  other v1: 108.45,24.292
EMIS_IND: DD1.2 R54.2 | length 37.8
  Top Layer w0.3: DD1.2@116.475,40.525 116.475,41.607 117.068,42.2 134.256,42.2 140.056,36.4 148.425,36.4 149.35,37.325 R54.2@150.2,37.325
ETH_CS: DD1.92 DD9.29 | length 49
  Top Layer w0.3: DD1.92@118.5,35 120.9,35 122.048,33.852 157.716,33.852 162.064,38.2 DD9.29@165.2,38.2
ETH_INT: DD1.88 DD9.47 | length 55.3
  Top Layer w0.3: DD1.88@118.5,33 119.625,33 121.225,31.4 170.89,31.4 171.5,32.01 DD9.47@171.5,33.4
ETH_MISO: DD1.90 DD9.33 | length 48.8
  Top Layer w0.3: DD1.90@118.5,34 120.3,34 121.682,32.618 159.168,32.618 162.25,35.7 163.605,35.7 164.105,36.2 DD9.33@165.2,36.2
ETH_MOSI: DD1.91 DD9.32 | length 48.7
  Top Layer w0.3: DD1.91@118.5,34.5 119.213,34.5 120.597,34.5 121.873,33.224 158.387,33.224 161.463,36.3 163.498,36.3 163.898,36.7 DD9.32@165.2,36.7
ETH_RST: DD1.93 DD9.48 R72.1 | length 64.5
  Top Layer w0.3: DD1.93@118.5,35.5 121.2,35.5 122.2,34.5 157,34.5 v1(160,37.5) ; v1(160,30.75) 171.92,30.75 172.02,30.85 172,30.87 DD9.48@172,33.4
  Bottom Layer w0.3: v1(160,30.75) v1(160,37.5)
ETH_SCLK: DD1.89 DD9.30 | length 52.6
  Top Layer w0.3: DD1.89@118.5,33.5 120,33.5 121.5,32 v1(162,32) ; v1(162,37) 162.7,37.7 DD9.30@165.2,37.7
  Bottom Layer w0.3: v1(162,32) v1(162,37)
EXT_AN_MOD: C102.2 DA8A6.1 DA8A7.1 DA18.1 DD1.32 R100.1 | length 6.8
  Top Layer w0.3: v1(34.275,32.632) 34.975,33.332 C102.2@36.05,33.332 R100.1@36.05,31.882 36.05,30.582 35.925,30.457 DA18.1@35.725,30.457 ; DD1.32@103.45,36 104.525,36 v1(104.9,36.375)
EXT_COM1: DD1.39 DD11.13 | length 84.8
  Top Layer w0.3: DD11.13@28.5,15.86 32.185,15.86 33.8,17.475 v1(33.8,18.3) ; v1(101.5,33.125) 102.125,32.5 DD1.39@103.45,32.5
  GND Layer w0.3: v1(33.8,18.3) 33.8,21.672 45.253,33.125 v1(101.5,33.125)
EXT_COM2: DD1.41 DD11.12 | length 88.6
  Top Layer w0.3: DD11.12@28.5,14.59 28.57,14.66 32.085,14.66 34.55,17.125 v1(34.55,20) ; DD1.41@103.45,31.5 104.586,31.5 104.836,31.25 v1(104.9,31.25)
  GND Layer w0.3: v1(34.55,20) 34.55,21.785 45.29,32.525 102.207,32.525 103.482,31.25 v1(104.9,31.25)
EXT_COM3: DD1.42 DD11.11 | length 86
  Top Layer w0.3: DD11.11@28.5,13.32 31.845,13.32 35.2,16.675 v1(35.2,19.3) ; v1(101.5,31.925) 102.425,31 DD1.42@103.45,31
  GND Layer w0.3: v1(35.2,19.3) 35.2,21.759 45.366,31.925 v1(101.5,31.925)
EXT_DIG_MOD: DA10A6.1 DA10A7.1 DD1.40 DD11.14 | length 161
  Top Layer w0.3: DD11.14@28.5,17.13 28.598,17.228 31.563,17.228 32.603,18.268 32.743,18.268 v1(32.8,18.325) ; DD1.40@103.45,32 104.163,32 104.213,32.05 104.349,32.05 104.394,32.095 104.855,32.095 v1(104.9,32.05)
  Power Layer w0.3: v1(32.8,18.325) 32.743,18.382 32.743,18.595 32.733,18.604 32.733,19.208 34.45,20.925 v1(52.525,20.925) 79.975,20.925 82.225,23.175 v1(82.225,25.275)
  GND Layer w0.3: v1(32.8,18.325) 32.743,18.382 32.743,18.595 32.733,18.604 32.733,21.242 45.292,33.8 102.189,33.8 103.841,32.148 104.589,32.148 104.63,32.107 104.843,32.107 v1(104.9,32.05) ; v1(52.525,20.925) v1(52.525,25.275)
  Bottom Layer w0.3: DA10A7.1@44.95,25.275 v1(52.525,25.275) ; DA10A6.1@74.65,25.275 v1(82.225,25.275)
EXT_FLAG1: DD1.43 R101.2 | length 85
  Top Layer w0.3: DD1.43@103.45,30.5 104.85,30.5 v1(104.9,30.45)
  GND Layer w0.3: v1(31.7,16.488) 34.67,16.488 49.507,31.325 102.217,31.325 103.092,30.45 v1(104.9,30.45)
  Bottom Layer w0.3: R101.2@30.075,19.2 30.867,19.2 31.7,18.367 v1(31.7,16.488)
EXT_FLAG2: DD1.44 R102.2 | length 80.7
  Top Layer w0.3: v1(101.5,30.725) 102.225,30 DD1.44@103.45,30
  GND Layer w0.3: v1(31.7,15.26) 31.728,15.288 34.107,15.288 49.544,30.725 v1(101.5,30.725)
  Bottom Layer w0.3: R102.2@30.075,16.7 30.075,16.65 30.35,16.375 30.617,16.375 31.7,15.292 v1(31.7,15.26)
EXT_FLAG3: DD1.45 R103.2 | length 83.2
  Top Layer w0.3: DD1.45@103.45,29.5 104.125,29.5 v1(104.9,29.5)
  GND Layer w0.3: v1(31.7,14.06) 31.728,14.088 33.543,14.088 49.555,30.1 102.169,30.1 102.769,29.5 v1(104.9,29.5)
  Bottom Layer w0.3: R103.2@30.075,14.1 30.115,14.06 v1(31.7,14.06)
EXT_FLAG4: DD1.46 R104.2 | length 81
  Top Layer w0.3: v1(101.5,29.5) 102,29 DD1.46@103.45,29
  GND Layer w0.3: v1(31.7,11.6) 31.752,11.6 49.652,29.5 v1(101.5,29.5)
  Bottom Layer w0.3: R104.2@30.075,11.6 v1(31.7,11.6)
EXT_IL1: DD1.33 R93.2 U7.16 | length 90.3
  Top Layer w0.3: U7.16@26.92,54 R93.2@28.95,54 28.975,53.975 28.975,53.025 v1(29,53) ; DD1.33@103.45,35.5 v1(104.9,35.5)
  GND Layer w0.3: v1(29,53) 32.95,49.05 32.95,44.525 38.35,39.125 98.425,39.125 101.15,36.4 104,36.4 v1(104.9,35.5)
EXT_IL2: DD1.34 R94.2 U7.14 | length 85.7
  Top Layer w0.3: U7.14@26.9,51.48 R94.2@28.93,51.48 ; R94.2@28.95,51.5 28.975,51.475 28.975,50.525 v1(29,50.5) ; v1(99.85,36.775) 100.475,36.775 102.25,35 DD1.34@103.45,35
  GND Layer w0.3: v1(29,50.5) 32.225,47.275 32.225,44.175 37.725,38.675 97.95,38.675 v1(99.85,36.775)
EXT_KEY: DD1.36 R96.2 U7.12 | length 87.1
  Top Layer w0.3: U7.12@26.9,48.94 28.91,48.94 R96.2@28.95,48.9 ; R96.2@28.95,48.94 28.975,48.915 28.975,47.965 v1(29,47.94) ; DD1.36@103.45,34 104.344,34 104.819,34.475 v1(104.9,34.475)
  GND Layer w0.3: v1(29,47.94) 31.45,45.49 31.45,43.95 37.175,38.225 97.45,38.225 99.875,35.8 102.574,35.8 103.899,34.475 v1(104.9,34.475)
EXT_MP_EN: DD1.38 R97.2 U7.10 | length 85.7
  Top Layer w0.3: U7.10@26.9,46.4 R97.2@28.95,46.4 28.975,46.375 28.975,45.425 v1(29,45.4) ; DD1.38@103.45,33 104.669,33 104.819,32.85 v1(104.9,32.85)
  GND Layer w0.3: v1(29,45.4) 36.625,37.775 96.95,37.775 99.55,35.175 101.979,35.175 104.281,32.873 104.877,32.873 v1(104.9,32.85)
EXT_PMO: DD1.35 DD12.2 | length 81.3
  Top Layer w0.3: v1(101.5,34.5) DD1.35@103.45,34.5
  Top Layer w0.5: DD12.2@26.8,23.2 v1(28.15,23.2)
  GND Layer w0.3: v1(28.15,23.2) 34.055,23.2 45.355,34.5 v1(101.5,34.5)
FIBER_IL: DD1.82 DD8.4 | length 26.5
  Top Layer w0.3: DD8.4@111.15,10.95 111.15,11.275 111.275,11.4 112.1,11.4 v1(119.1,18.4) ; DD1.82@118.5,30 119.349,30 119.843,30.493 119.843,31.093 v1(119.9,31.15)
  Power Layer w0.3: v1(119.1,18.4) 119.1,30.35 v1(119.9,31.15)
FLAG1_HW: R117.2 U8.15 XP9.19 | length 18.5
  Bottom Layer w0.3: XP9.19@3.6,20.5 5.05,19.05 18.55,19.05 18.875,18.725 R117.2@18.875,17.94 U8.15@20.6,17.94
FLAG2_HW: R118.2 U8.13 XP9.22 | length 20.4
  Bottom Layer w0.3: XP9.22@1.6,18.5 2.6,17.5 4.6,17.5 5.682,16.418 18.128,16.418 18.6,15.946 18.6,15.675 R118.2@18.875,15.4 U8.13@20.6,15.4
FLAG3_HW: R120.2 U8.11 XP9.23 | length 19
  Bottom Layer w0.3: XP9.23@3.6,16.5 5.996,14.104 18.396,14.104 18.875,13.625 R120.2@18.875,12.86 U8.11@20.6,12.86 ; U8.11@20.585,13.02 U8.11@20.625,12.98
FLAG4_HW: R121.2 U8.9 XP9.24 | length 21.8
  Bottom Layer w0.3: XP9.24@1.6,16.5 6.9,11.2 18.467,11.2 18.643,11.024 18.643,10.552 R121.2@18.875,10.32 U8.9@20.6,10.32
FLOW: DD1.77 DD13.6 | length 57
  Top Layer w0.3: DD1.77@118.5,27.5 119.625,27.5 120.068,27.057 120.068,26.757 v1(120.125,26.7)
  Top Layer w0.5: v1(169.525,16.725) 169.532,16.718 169.532,15.407 DD13.6@169.539,15.4
  GND Layer w0.3: v1(149,25.35) 153.675,25.35 155.875,23.15 163.1,23.15 v1(169.525,16.725)
  Bottom Layer w0.3: v1(120.125,26.7) 121.475,25.35 v1(149,25.35)
GND: C2.2 C3.1 C6.2 C7.2 C8.2 C11.1 C12.1 C13.1 C14.2 C16.2 C17.2 C18.2 C19.2 C20.2 C21.2 C22.2 C23.2 C24.2 C35.2 C38.2 C39.2 C48A6.2 C48A7.2 C49A6.2 C49A7.2 C52A6.2 C52A7.2 C58A6.2 C58A7.2 C70.2 C71.2 C72.2 C74.2 C75.2 C76.2 C77.2 C78.2 C79.2 C80.2 C81.2 C82.2 C83.2 C84.2 C85.2 C86.2 C87.2 C88.2 C89.2 C90.2 C91.2 C92.2 C98.2 C101.2 C103.2 C117.2 DA1.7 DA2.2 DA2.3 DA2.5 DA2.6 DA2.7 DA9A6.5 DA9A7.5 DA10A6.2 DA10A7.2 DA15.5 DA16.5 DA17.2 DD1.10 DD1.27 DD1.74 DD1.99 DD2.4 DD3.4 DD5.9 DD5.15 DD6.2 DD6.3 DD6.8 DD7A6.2 DD7A6.8 DD7A7.2 DD7A7.8 DD8.3 DD9.1 DD9.7 DD9.10 DD9.16 DD9.23 DD9.25 DD9.26 DD9.27 DD9.28 DD9.46 DD10.2 DD10.8 DD11.9 DD11.15 DD12.4 DD13.5 DD13.7 GB1.1 R7.1 R8.1 R9.2 R10.2 R48.2 R51.1 R52.1 R68.1 U3.2 U4.2 U5.2 U7.9 U7.11 U7.13 U7.15 U8.2 U8.4 U8.6 U8.8 VD1.2 VD2.2 VD3.2 XP3.3 XP8.2 ZQ2.2 ZQ2.4 ZQ3.2 ZQ3.4 | length 116.4
  Top Layer w0.3: DD11.15@28.5,18.4 30.45,18.4 C101.2@30.6,18.25 30.757,18.407 31.349,18.407 31.742,18.8 ; DD1.27@103.45,38.5 104.551,38.5 104.927,38.876 104.927,39.124 104.151,39.9 ; XP8.2@110.2,2.3 C74.2@110.2,5.5 ; DD1.10@112.475,40.525 112.475,39.374 112.8,39.049 ; ZQ2.2@113.175,49.275 113.225,49.325 C21.2@113.225,50.875 ; v1(114.275,45.2) 114.275,45.281 114.5,45.506 114.5,46.1 C23.2@114.775,46.375 114.775,47.875 ZQ2.4@114.875,47.975 ; 115.758,27.126 116.475,26.409 DD1.74@116.475,25.475 116.475,24.225 ; 116.962,37.912 117.55,38.5 DD1.99@118.5,38.5 ; C20.2@117.875,48.025 117.875,48.625 ; C22.2@117.875,49.375 117.875,48.625 ; 119.025,48.625 117.875,48.625 ; C70.2@120.55,21.1 R48.2@120.55,15.9 120.55,12.621 120.85,12.321 121.637,12.321 DA16.5@121.65,12.307 ; 120.559,17.55 DA15.5@121.65,17.55 ; DD9.28@165.2,38.7 DD9.27@165.2,39.2 DD9.26@165.2,39.7 DD9.25@165.2,40.2 ; ZQ3.4@170.975,46.7 171.425,47.15 171.425,47.375 172.225,48.175 172.225,48.45 172.525,48.75 C82.2@174.375,48.75 175.937,48.75 R68.1@175.975,48.712 ; DA2.7@171.1,23.4 171.181,23.319 172.881,23.319 C6.2@173.1,23.1 ; 171.5,34.7 DD9.1@173.3,34.7 ; 171.9,39.2 DD9.10@173.3,39.2 ; C84.2@172.6,50.7 172.6,48.975 ZQ3.2@172.675,48.9
  Top Layer w0.5: DD12.4@26.8,25.75 28.075,25.75 28.15,25.825 28.625,25.825 C103.2@28.8,26 ; DD10.2@28.5,34.975 C98.2@30.325,34.975 ; v1(36.225,19.425) 37.25,18.4 v1@40.223,18.4 ; R8.1@91.275,41.65 91.475,41.45 C7.2@92.95,41.45 ; VD1.2@106.4,51.1 VD2.2@108.31,51.1 VD3.2@110.225,51.1 ; DD5.9@143.171,20.01 143.221,20.06 143.221,21.288 143.281,21.348 143.281,21.9 C39.2@143.456,22.075 ; DA2.3@165.1,22.1 DA2.2@165.1,23.4 ; DD13.7@168.239,15.4 168.239,17.464 C117.2@168.4,17.625 ; DA2.5@171.1,20.85 DA2.6@171.1,22.1 DA2.7@171.1,23.4
  Bottom Layer w0.3: 25.64,12.8 25.64,10.66 25.976,10.324 U8.8@26.816,10.324 ; C58A6.2@69.975,21.95 C58A6.2@70.225,22.2 ; C58A6.2@70.125,22.1 70.125,22.15 70.4,22.425 70.45,22.425 70.775,22.75 70.775,23.575 C52A6.2@70.825,23.625 ; DD6.2@135.551,20.01 135.551,18.376 135.727,18.2 136.821,18.2 ; DD6.3@136.821,20.01 136.821,18.2 ; DD6.8@143.171,20.01 143.171,18.376 142.996,18.2 136.821,18.2 ; DA17.2@184.3,27.225 184.312,27.212 185.588,27.212 v1(185.6,27.2)
  Bottom Layer w0.5: v1(40.25,18.4) 40.255,18.405 40.255,19.995 DD7A7.2@40.26,20 40.26,22.003 40.582,22.325 41.244,22.325 41.375,22.456 C52A7.2@41.375,23.55 ; v1(69.975,18.4) C58A6.2@69.975,21.95 ; 113.109,38.74 113.375,38.474 113.375,38.075 C11.1@113.55,37.9 C17.2@115.4,37.9 ; DD6.8@143.171,20.01 143.221,20.06 143.221,21.291 143.281,21.351 143.281,21.9 C38.2@143.456,22.075
  Bottom Layer w1: 175.775,19.025 177.55,17.25 181.625,17.25 ; C3.1@183.225,17.25 183.325,17.35 187.1,17.35 C2.2@187.225,17.475
  other v1: 104.7,0.4 106.4,0.4 108.1,0.4 109.8,0.4 112.3,0.4 115.2,0.4 118.2,0.4 125.2,0.5 127.7,0.5 116.7,1.6 104.7,3 112.4,3 115.2,3 118.2,3 125.2,3.2 127.7,3.2 106.4,4.5 113.8,4.5 116.7,4.5 104.7,5.9 112.4,5.9 115.2,5.9 127.7,6.1 106.4,7.3 113.8,7.3 104.7,8.75 112.4,8.75 115.2,8.75 127.7,8.75 104.6,10.75 106.5,10.75 102.675,10.775 112.9,10.825 115.9,10.825 118.1,10.825 127.7,10.825 99.7,13.8 102.2,13.8 104.6,13.8 106.6,13.8 108.8,13.8 111,13.8 112.9,13.8 115.9,13.8 118.1,13.8 120.1,13.8 127.7,13.8 98.357,15.143 129.4,15.5 108.875,15.9 126,16.1 97.3,16.2 99.7,16.2 102.2,16.2 104.6,16.2 106.5,16.2 127.7,16.2 126,16.9 96.2,17.3 127.7,17.6 99.7,17.8 102.2,17.8 104.6,17.9 106.5,17.9 130.031,18.5 131.831,18.5 61.675,18.675 63.95,18.675 65.75,18.675 61.3,21.925 64.025,21.925 65.75,21.925 168,22.225 37.818,22.872 177.725,24 53.6,24.3 55.05,24.3 83.375,24.3 84.825,24.3 61.525,24.425 63.95,24.425 65.75,24.425 168,24.475 125,26.4 140,27 146,27 149,27 163.45,27 168.525,27 171.4,27 174.4,27 125,27.06 26.1,28 178.484,28.009 113.05,29.1 26.1,29.5 137,30.55 143,30.55 146,30.55 152,30.55 107.6,30.7 26.1,31 113.025,31.7 177.3,31.7 174.9,31.8 164.7,32 166.5,32 26.1,32.5 165.5,32.7 173.6,32.9 175.8,32.9 113,34.3 107.575,34.875 182.5,35.2 167.3,35.6 169.1,35.6 170.8,35.6 31.575,36.2 91.5,36.5 93.5,36.5 95.95,36.5 177.6,36.6 124.8,36.7 127.1,36.7 129.4,36.7 131.7,36.7 133.8,36.7 136.2,36.7 182.5,36.7 167.3,37.3 169.1,37.3 170.8,37.3 177.6,38.3 182.5,38.7 189.1,38.7 144.375,38.775 122.3,39 124.1,39 126.1,39 128.3,39 130.4,39 132.5,39 134.7,39 167.3,39 169.1,39 170.8,39 95.825,39.975 97.025,40 140.464,40.164 182.5,40.3 189.1,40.5 139.314,41.314 31.3,41.45 138.164,42.464 187,42.5 189.1,42.5 182.5,43.3 160,44 163,44 184.6,44.2 187,44.2 182.5,46.1 184.6,46.1 187,46.1 160,47 163,47 166,47 160,50 163,50 166,50 183,50 186,50 174.4,50.7 121.7,52.4 123.5,52.4 125.3,52.4 127.1,52.4 129,52.4 131,52.4 133,52.4 135.1,52.4 93.55,52.425 160,53 163,53 166,53 180,53 183,53 186,53 111.675,53.5 114.05,53.5 116.7,53.5 119.55,53.5 93.5,54
GND_24V: C1.2 C36.2 C50A6.2 C50A7.2 C104.2 C113.2 DA1.1 DA5.1 DA11A6.1 DA11A7.1 DA19.1 DA22.1 U3.3 U4.3 U5.3 XP2.2 | length 288
  Top Layer w0.3: U5.3@148.175,47.275 v1(148.175,48.675) ; U4.3@151.475,47.275 v1(151.475,48.675) ; U3.3@154.775,47.275 v1(154.775,48.675)
  Top Layer w1: DA22.1@175.975,9.695 188.05,9.695 ; DA1.1@185.25,2.12 185.38,2.25 186.437,2.25 188.05,3.863 188.05,9.695 ; XP2.2@197.4,15.425 197.4,13.275 193.82,9.695 188.05,9.695
  GND Layer w0.8: v1(148.175,48.675) v1(151.475,48.675) v1(154.775,48.675) 155.875,47.575 155.875,28.2 v3(156.775,27.3)
  GND Layer w1: DA19.1@31.38,2.6 33.952,5.172 33.952,11.302 39.333,16.683 61.3,16.683 ; DA11A7.1@61.3,9.7 61.3,16.683 ; DA11A6.1@91.05,9.72 91.25,9.92 91.72,9.92 96.275,14.475 ; v3(156.775,19.025) 156.781,19.019 156.781,16.575 ; DA5.1@156.781,9.7 156.781,16.575 ; DA22.1@175.975,9.695 173.27,12.4 162.998,12.4 158.823,16.575 156.781,16.575 ; 61.3,16.683 94.067,16.683 96.275,14.475 ; 96.275,14.475 98.376,12.374 128.657,12.374 132.858,16.575 156.781,16.575
  Bottom Layer w0.3: C104.2@31.38,5.58 C104.2@31.8,6
  Bottom Layer w0.8: v3(156.775,19.025) v3(156.775,27.3)
  Bottom Layer w1: DA19.1@31.38,2.6 C104.2@31.38,5.58 ; DA11A7.1@61.325,9.695 61.325,11.464 61.911,12.05 C50A7.2@64.025,12.05 ; DA11A6.1@91.05,9.695 91.05,11.464 91.636,12.05 C50A6.2@93.75,12.05 ; DA5.1@156.781,9.7 156.781,11.781 158.225,13.225 C36.2@160.35,13.225 ; DA22.1@175.975,9.695 175.975,11.7 177.5,13.225 C113.2@179.525,13.225 ; DA1.1@185.25,2.1 187.65,2.1 C1.2@188.05,1.7
GND_DRVA6: C53A6.2 C55A6.2 C57A6.1 C59A6.1 C60A6.2 C62A6.2 C63A6.2 C65A6.2 C66A6.2 DA11A6.3 DA12A6.2 DA13A6.5 DD7A6.9 DD7A6.15 R35A6.2 R40A6.1 R42A6.2 R43A6.2 U1A6.5 U2A6.3 U2A6.4 XP5A6.2 | length 40.7
  Top Layer w0.3: C55A6.2@68.525,6.65 R35A6.2@71.425,6.65 ; R43A6.2@75.975,14.85 R42A6.2@77.425,14.85
  GND Layer w1: XP5A6.2@75.185,1.653 74.185,1.653 72.845,2.994 72.845,4.851 73.43,5.437 82.411,5.437 83.225,4.623 DA11A6.3@91.05,4.623
  Bottom Layer w0.5: v1(69.645,2.003) 69.66,2.019 DA12A6.2@69.66,5.025 ; DA12A6.2@69.65,5.025 C65A6.2@69.65,6.65 ; C65A6.2@69.675,6.675 69.769,6.769 69.769,7.542 69.95,7.722 69.95,8.25 C62A6.2@70.125,8.425 ; DD7A6.15@69.975,10.4 70.025,10.35 70.025,8.5 C62A6.2@70.1,8.425
  Bottom Layer w1: C53A6.2@88.015,6.488 88.615,5.888 88.615,5.201 89.201,4.615 DA11A6.3@91.05,4.615
  other v1: 68.87,0.703 84.361,1.087 86.145,1.203 86.145,2.903 82.225,10.05 82.2,11 82.2,11.775 68.9,12.628
GND_DRVA7: C53A7.2 C55A7.2 C57A7.1 C59A7.1 C60A7.2 C62A7.2 C63A7.2 C65A7.2 C66A7.2 DA11A7.3 DA12A7.2 DA13A7.5 DD7A7.9 DD7A7.15 R35A7.2 R40A7.1 R42A7.2 R43A7.2 U1A7.5 U2A7.3 U2A7.4 XP5A7.2 | length 37.9
  Top Layer w0.5: C55A7.2@38.875,6.925 C57A7.1@40.325,6.925 R35A7.2@41.775,6.925 ; R43A7.2@46.225,14.85 R42A7.2@47.675,14.85
  GND Layer w1: XP5A7.2@45.45,1.653 44.46,1.653 43.12,2.994 43.12,4.839 43.705,5.425 52.775,5.425 53.576,4.623 DA11A7.3@61.325,4.623
  Bottom Layer w0.5: DA12A7.2@40.025,5.1 DA12A7.2@40.025,5.025 C65A7.2@40.025,6.65 ; C65A7.2@40.05,6.725 C65A7.2@40.05,6.675 40.225,6.85 40.225,7.409 40.34,7.524 40.34,8.365 C62A7.2@40.4,8.425 ; DD7A7.15@40.26,10.4 40.26,8.44 C62A7.2@40.375,8.325
  Bottom Layer w1: C53A7.2@58.3,6.525 58.9,5.925 58.9,5.201 59.486,4.615 DA11A7.3@61.325,4.615
  other v1: 38.75,0.7 54.225,1.2 55.925,1.2 40.025,2 55.925,2.7 52.4,9.775 52.4,10.5 52.425,11.35 38.504,12.625
GND_FS: C114.2 C115.2 C116.2 DA22.3 DD13.4 R122.2 XP10.3 | length 7.9
  Top Layer w1: 173.975,4.615 DA22.3@175.975,4.615
  Bottom Layer w1: 173.975,4.615 179.425,4.615 179.525,4.715 C116.2@179.525,5
  other v1: 166.825,4.3 166.25,5.125 167.425,5.125